# Altium PCB PCB3.PcbDoc
Units mil, origin at the board's own origin, x right, y up, seen from the top; angles counter-clockwise.
Board outline 1295 x 860 mil, 2 copper layers (Top Layer, Bottom Layer); 12 components, 9 nets, 58 pads, 7 vias.
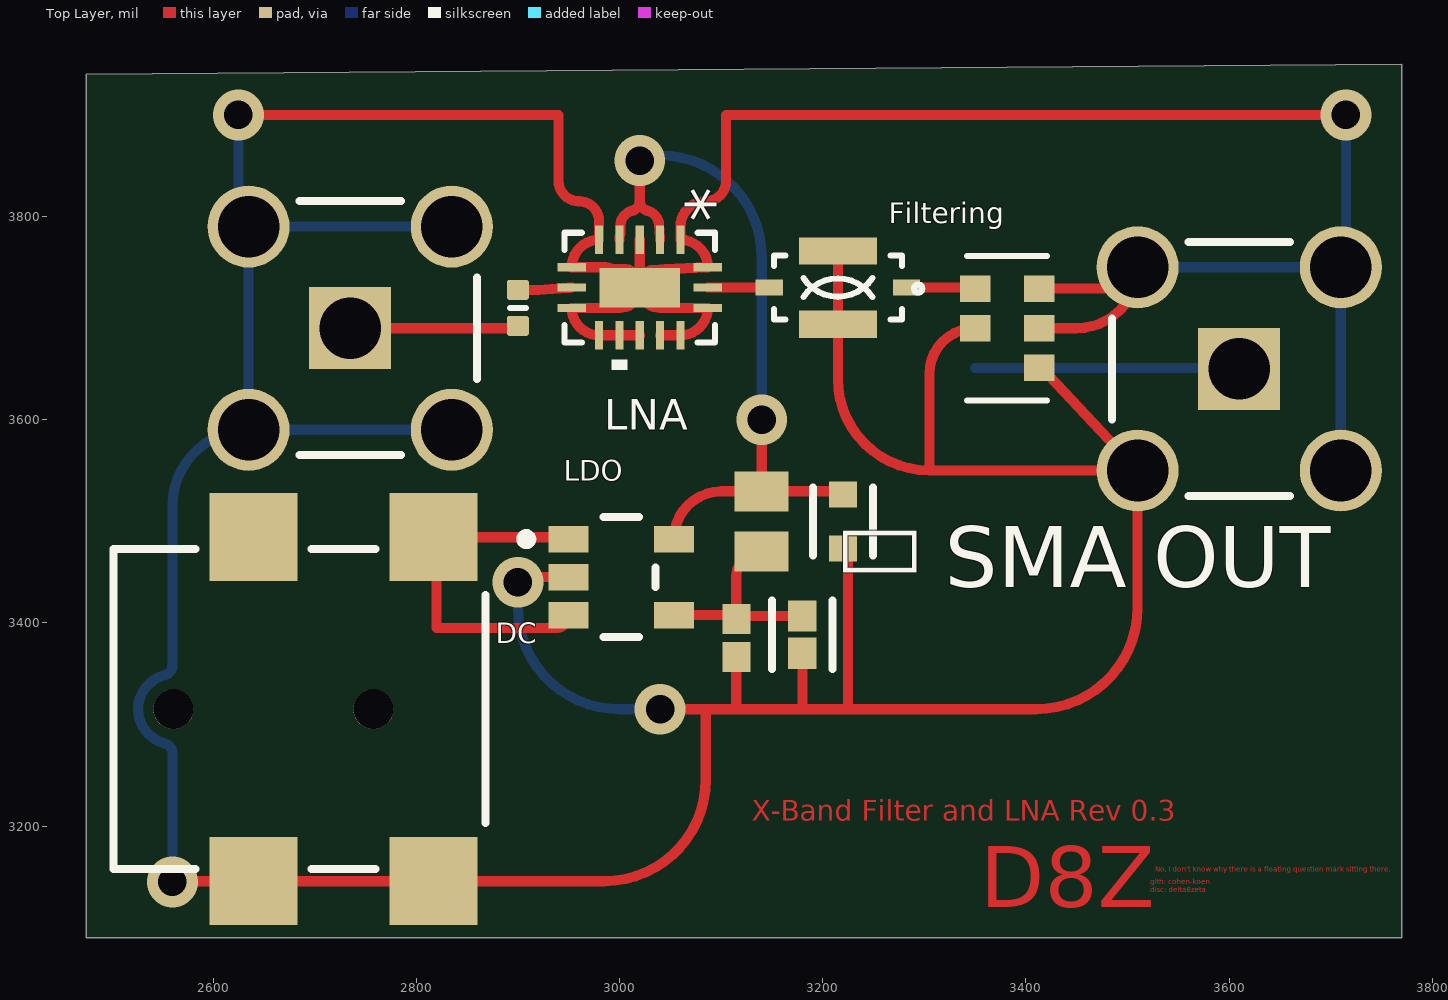
[diagram p0: Top Layer view]
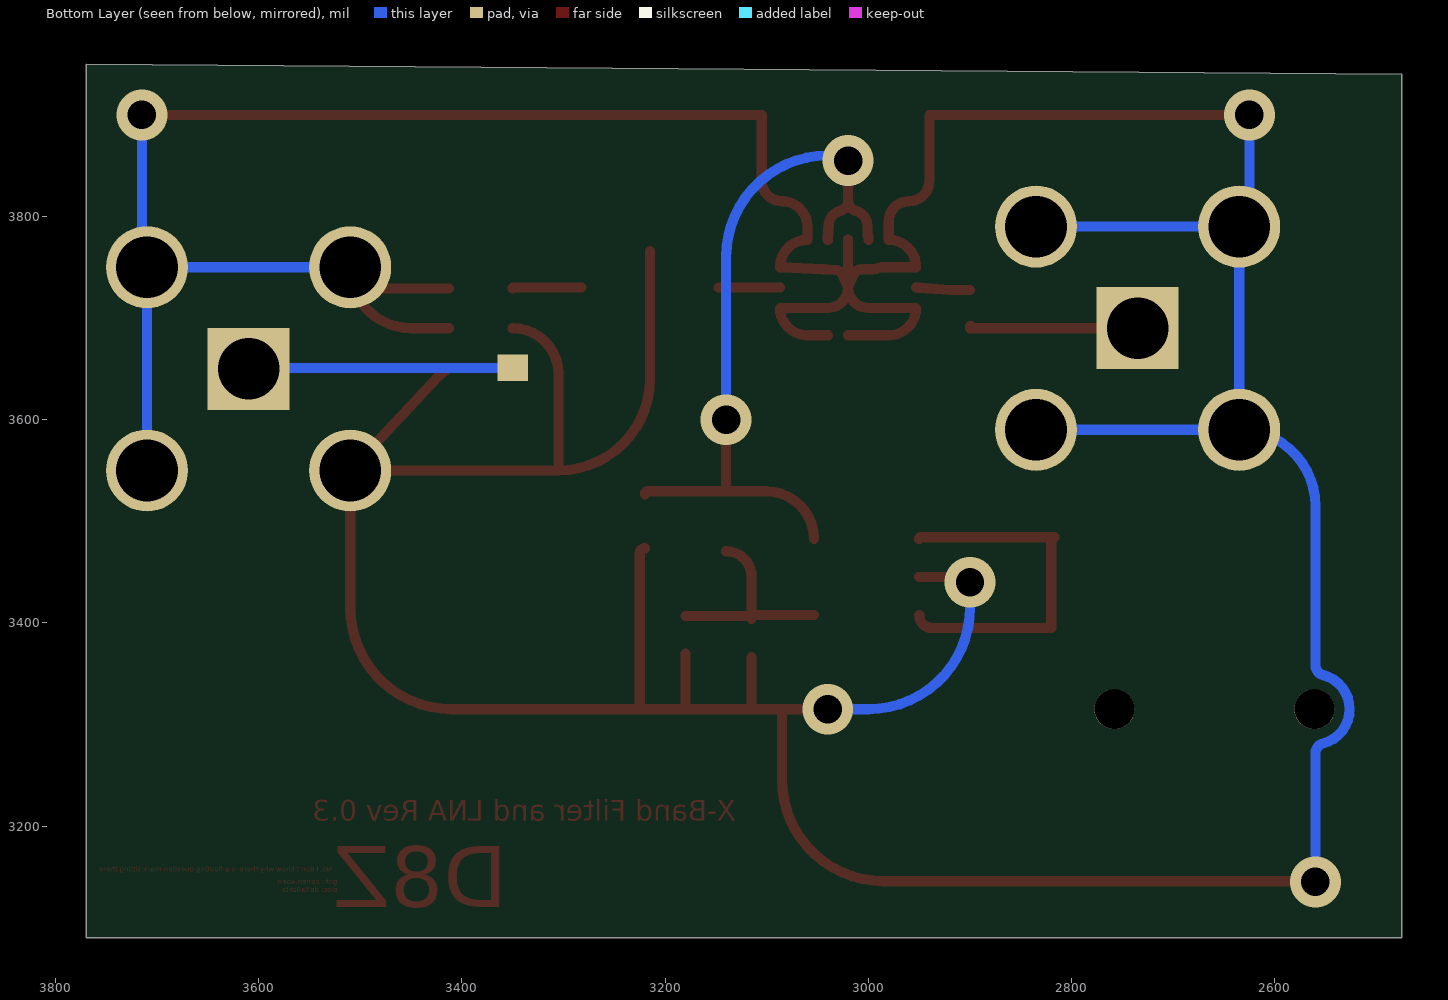
[diagram p1: Bottom Layer view, seen from below]
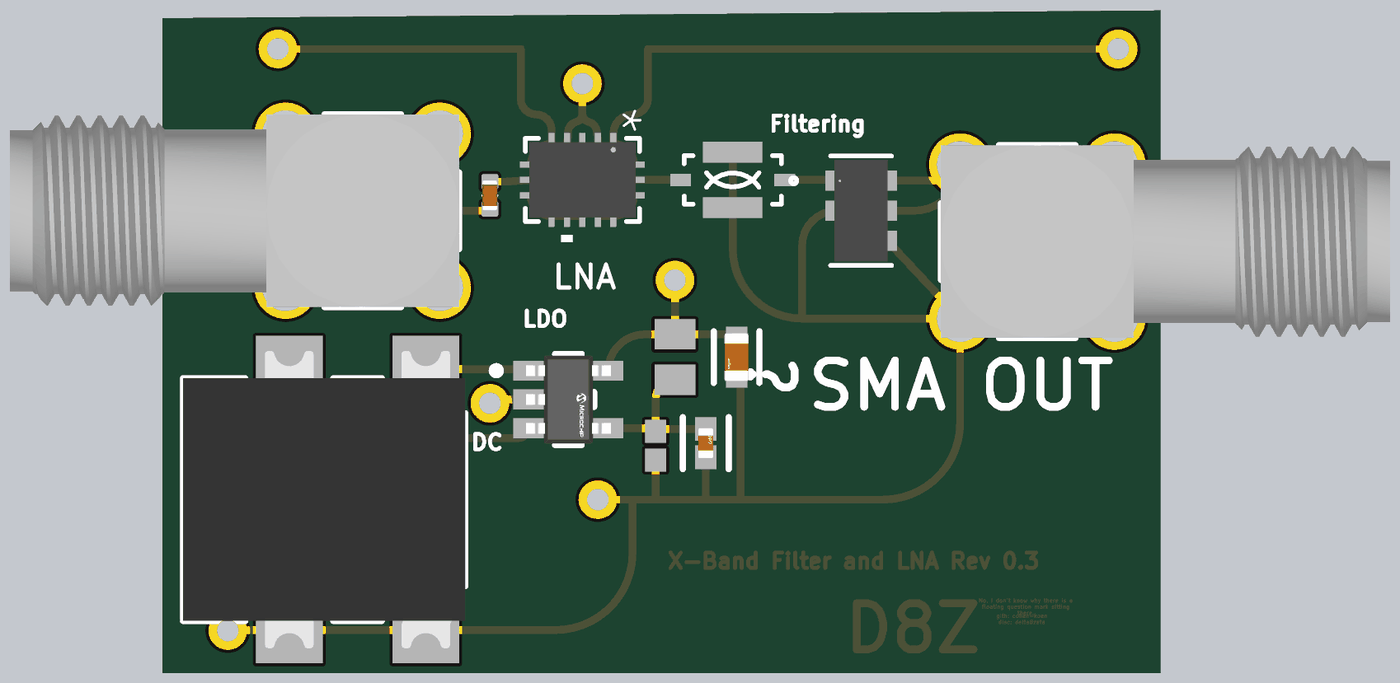
[diagram p2: 3D render of the assembled board from above, using the file's embedded part models]

## Layer stack, top to bottom
Top Solder: solder mask 0.4, Solder Resist, Dk 3.5
Top Layer: signal copper 1.4
Dielectric 1: dielectric 12.6, FR-4, Dk 4.8
Bottom Layer: signal copper 1.4
Bottom Solder: solder mask 0.4, Solder Resist, Dk 3.5

## Board outline
2475,3940 3770,3950 3770,3090 2475,3090

## Design rules (kind name [scope] priority, off if disabled: settings)
Clearance [All] p1: gap=10 ignorepadtopadclearanceinfootprint=FALSE except(0: Arc-Hole Track-Hole SMDPad-Hole THPad-Hole Via-Hole Fill-Hole Poly-Hole Region-Hole Text-Hole)
PolygonConnect [All] p1: connectstyle=Relief reliefconductorwidth=10 reliefentries=4 polygonreliefangle="90 Angle" airgapwidth=10
RoutingVias [All] p1: holewidth=28 width=50 viastyle="Through Hole" minholewidth=28 minwidth=50 maxholewidth=28 maxwidth=50
SolderMaskExpansion [All] p1: expansion=4 istentingtop=FALSE
Width [All] p1: maxlimit=10 minlimit=10 preferedwidth=10
30 further rules are at their usual default settings.

## Classes and differential pairs
component class Sheet1:  DC Filtering LDO LNA "SMA OUT"

## Components (designator, comment, footprint, x,y, rotation, side; value= is the part's Value field where it differs from the comment)
 "" RESC2013X60X40LL20T25 3140,3500 r270 top (schematic designator R3)
C2 "2.2 uF" FP-GRM188-0_1-e0_2_0_5-MFG 3220,3500 r270 top value=2.2uF
C3 "470 pF" FP-0402-L_1_0_1-W_0_5_0_1-IPC_A 3180,3388.33 r90 top value=470pF
DC "694102107102" 694102107102 2685,3315 r270 top (schematic designator J?)
Filtering "HFCN-7150+" FV1206-1_MNC 3381.5,3690 r0 top (schematic designator U1)
LDO "MIC5205YM5-TR" FP-SOT23-5LD-PL-1-MFG 3001.77,3445 r0 top (schematic designator U4)
LNA "Capacitor 10nF +/-20% 50V 0402" CAPC0402(1005)60_L 2900,3710 r90 top value=10nF (schematic designator C1)
R2 "" RESC1005X40X25ML10T10 3115,3385 r270 top
"SMA OUT" "731000114" MOLX-731000114_V 3610,3650 r180 top
U2 "LFCN-8400+" FV1206-4_MNC 3215,3730 r0 top
U3 "PMA-183PLN+" JV2579_MNC 3020,3730 r270 top
? "731000114" MOLX-731000114_V 2735,3690 r0 top

## Footprints (in the part's own frame and the unit in brackets; to place one, negate y for a bottom-side part, rotate by r counter-clockwise, add the part's x,y. Pads: shape width x height; smd on the part's side, far side on the other; paste and mask are expansions set on the pad)
694102107102 [mm] "DC Power Jack Right Angled Low Profile SMT ?3.9 with 4 soldering pads & pegs"
  rect 2.2x2.2 smd: 1(-4.3,3.35) 1(-4.3,-1.15) 2(4.3,-1.15) 3(4.3,3.35)
  round 1 hole 1 unplated: MH1(0,1.85) MH2(0,-3.15)
  silkscreen extent -4,-4.65 4,4.65, body extent -4.9,-4.65 4.9,4.65, height 5.32
CAPC0402(1005)60_L [mm] "Chip Capacitor, Body 1.0x0.5mm, Height 0.6mm, IPC High Density"
  rrect25% 0.5x0.55 smd: 1(-0.45,0) 2(0.45,0)
  silkscreen extent 0,-0.2 0,0.2, body extent -0.5,-0.25 0.5,0.25, height 0.6
FP-0402-L_1_0_1-W_0_5_0_1-IPC_A [mil]
  rect 30.75x28.04 smd paste+0 mask+0: 1(-18.33,0) 2(18.33,0)
  silkscreen extent -34,-30 34,30, body extent -42,-22 42,22, height 10
FP-GRM188-0_1-e0_2_0_5-MFG [mm]
  rect 0.65x0.7 smd paste+0 mask+0: 1(-0.675,0) 2(0.675,0)
  silkscreen extent -0.85,-0.75 0.85,0.75, body extent -1.1,-0.55 1.1,0.55, height 0.25
FP-SOT23-5LD-PL-1-MFG [mm]
  rect 1x0.66 smd paste+0 mask+0: 1(-1.315,0.95) 2(-1.315,0) 3(-1.315,-0.95) 4(1.315,-0.95) 5(1.315,0.95)
  silkscreen extent -2.5,-1.5 0.85,1.5, body extent -1.91,-1.6 1.91,1.6, height 0.25
FV1206-1_MNC [mil]
  rect 30x26 smd paste+0 mask+0: 1(-31.5,39) 2(-31.5,0) 4(31.5,-39) 5(31.5,0) 6(31.5,39)
  rect 30x26 smd far side paste+0 mask+0: 3(-31.5,-39)
  silkscreen extent -91,-71 40,71, body extent -34,-66 34,66, height 42
FV1206-4_MNC [mil]
  rect 27x16 smd paste+0 mask+0: 1(-67.5,0) 3(67.5,0)
  rect 77x27 smd paste+0 mask+0: 2(0,-36) 4(0,36)
  silkscreen extent -63,-32 63,32
JV2579_MNC [mil]
  rect 28x8 smd paste+0 mask+0: 1(-47,40) 2(-47,20) 3(-47,0) 4(-47,-20) 5(-47,-40) 9(47,-40) 10(47,-20) 11(47,0) 12(47,20) 13(47,40)
  rect 8x28 smd paste+0 mask+0: 6(-20,-67) 7(0,-67) 8(20,-67) 14(20,67) 15(0,67) 16(-20,67)
  rect 39x79 smd paste+0 mask+0: 17(0,0)
  silkscreen extent -54,-74 81,74, body extent -49,-69 49,69, height 33
MOLX-731000114_V [mm] "Connector, 5-Leads, Body 14.8x6.35mm, Pitch 2.54mm"
  rect 2.05x2.05 hole 1.54: 1(0,0)
  round 2.05 hole 1.54: 2(-2.54,2.54) 3(-2.54,-2.54) 4(2.54,-2.54) 5(2.54,2.54)
  silkscreen extent -1.26,-3.17 3.17,3.17, body extent -11.62,-3.17 3.18,3.18, height 9.57
RESC1005X40X25ML10T10 [mm] "Chip Resistor, 2-Leads, Body 1.00x0.50mm, IPC Low Density"
  rect 0.75x0.7 smd: 1(-0.475,0) 2(0.475,0)
  body extent -0.55,-0.3 0.55,0.3, height 0.4
RESC2013X60X40LL20T25 [mm] "Chip Resistor, 2-Leads, Body 2.00x1.25mm, IPC High Density"
  rect 1x1.35 smd: 1(-0.75,0) 2(0.75,0)
  body extent -1.1,-0.72 1.1,0.72, height 0.6

## Part data
: library part CMP-2001-00628-1, Manufacturer=Panasonic, Part Number=ERA6AEB331V
C2: library part CMP-2006-02836-2, "Chip Multilayer Ceramic Capacitors for General Purpose, 0603, 2.2uF, X7R, 15%, 10%, 10V", Capacitance=2.2uF, Case Code (Imperial)=0603, Case Code (Metric)=1608, Dielectric=X7R, Max Operating Temperature=125°C, Min Operating Temperature=-55°C, Package Quantity=1, Tolerance=10%, Voltage=10V, Case/Package=0603, Depth=0.8mm, Height=0.8mm, Lead Free="Lead Free", Length=1.6mm, Material=Ceramic, Mount="Surface Mount", Number of Pins=2, Packaging="Cut Tape", REACH SVHC="No SVHC", Termination=SMD/SMT, Thickness=0.035inch, Voltage Rating=10V, Voltage Rating (DC)=10V, Weight=7.1E-05oz, Width=0.031inch
C3: library part CMP-1034-01502-3, "General Purpose Ceramic Capacitor, 0402, 470pF, 10%, X7R, 15%, 50V", Capacitance=470pF, Case Code (Imperial)=0402, Case Code (Metric)=1005, Dielectric=X7R, Max Operating Temperature=125°C, Min Operating Temperature=-55°C, Package Quantity=10000, Tolerance=10%, Voltage=50V, Case/Package=0402, Construction=Flat, Contact Plating=Tin, Depth=0.5mm, Height=0.5mm, Lead Free="Lead Free", Length=1mm, Mount="Surface Mount", Number of Pins=2, Packaging="Tape and Reel", Radiation Hardening=No, REACH SVHC="No SVHC", RoHS Compliant=Yes, Series=-, Termination=SMD/SMT, Thickness=0.022inch, Voltage Rating=50V, Voltage Rating (DC)=50V, Width=0.5mm
DC: library part CMP-1502-00174-2, Color=Black, Current Rating=5A, Flammability Rating="UL94 V-0", Insulation Resistance=100MΩ, Max Operating Temperature=85°C, Min Operating Temperature=-40°C, Operating Supply Voltage=18V, Connector Type=Power, Contact Gender=Female, Contact Plating=Tin, Gender=Male, Housing Material=Polyamide, Mount="Surface Mount", NexarPartId=52645180, Packaging="Tape and Reel", REACH SVHC=Unknown, RoHS=Compliant, Shielding=Unshielded, Termination=SMD/SMT, Voltage Rating=18V, Voltage Rating (DC)=18V
Filtering U2 U3: "No Description Available", Mfr_Name="Mini Circuits", Copyright="Copyright (C) 2024 Ultra Librarian. All rights reserved.", RefDes=RefDes, Type=DEV
  Filtering: Manufacturer_Part_Number=HFCN-7150+
  U2: Manufacturer_Part_Number=LFCN-8400+
  U3: Manufacturer_Part_Number=PMA-183PLN+
LDO: library part CMP-06324-000022-1, "IC REG LIN POS ADJ 150MA SOT23-5", Dropout Voltage=165mV, Manufacturer=Microchip, Max Junction Temp=+125°C, Max Supply Voltage=16V, Min Supply Voltage=2.5V, Nominal Supply Current=80-1300uA, Output Current=150mA, Package=SOT23-5LD-PL-1, Temperature="-40°C to +125°C", Temperature Range Low=-40°C, Accuracy Percentage=1%, Automotive=No, Category=IC, ComponentLink2Description=Datasheet, ComponentLink2URL=http://ww1.microchip.com/downloads/en/DeviceDoc/20005785A.pdf, Device Class L1="Integrated Circuits (ICs)", Device Class L2="Power Management ICs", Device Class L3="Voltage Regulators - Linear", Digikey Description="IC REG LIN POS ADJ 150MA SOT23-5", Height=1.45mm, Lead Free=Yes, Manufacturer Part Number=MIC5205YM5-TR, Mouser Description="LDO Voltage Regulators 150mA 1% Low Noise LDO (Lead Free)", Number Of Outputs=1, Octopart=https://octopart.com/mic5205ym5-tr-microchip-66802135, Output Type=AdjustableProgrammable, RoHS=TRUE, Standoff Height=0mm, Temperature Range High=+125°C
LNA: library part CMP-001-00069-3, "Chip Capacitor, 10nF +/-20%, 50V, 0402, Thickness 0.6 mm", Case/Package=0402, Max Operating Temperature=85°C, Min Operating Temperature=-55°C, Tolerance=5%, Voltage Rating=50V, Mounting Technology=SMT, Pins=2
R2: library part CMP-2002-05819-1, Manufacturer=Panasonic, Part Number=ERA-2AEB621X
"SMA OUT" ?: library part CMP-2000-05487-1, "SMA Right-Angle PCB Jack Receptacle, Brass Body, Gold Plated, 50 Ohm, 5-Pin THD, RoHS, Tray", Manufacturer=Molex, Package Description="5-Pin Through Hole Device, Body 14.8 x 6.35 mm, Pitch 2.54 mm", Datasheet URL=http://www.molex.com/webdocs/datasheets/pdf/en-us/0731000114_RF_COAX_CONNECTORS.pdf, Datasheet Version=09/2016, Manufacturer URL=http://www.molex.com/, Mounting Technology=ThroughHole, Package Reference=731000114, Package URL=http://www.molex.com/pdm_docs/sd/731000114_sd.pdf

## Via types
v1: diameter 50, hole 28, Top Layer to Bottom Layer, 7 vias

## Nets (pads, with @x,y where several pads share a name; then routed paths per layer and width w, separated by ;. In a path a pad name is that pad's centre, name@x,y a point inside that pad or via, vN(x,y) a via of type N, cw(c..) or ccw(c..) an arc to the next point about the centre after c; other vN are vias at no path point)
GND: "SMA OUT.2" "SMA OUT.3" "SMA OUT.4" "SMA OUT.5" ?.2 ?.3 ?.4 ?.5 C2.2 C3.1 DC.2 DC.3 Filtering.2 Filtering.4 Filtering.5 Filtering.6 LDO.2 R2.2 U2.2 U2.4 U3.1 U3.3 U3.5 U3.6 U3.8 U3.9 U3.10 U3.11 U3.12 U3.13 U3.14 U3.16 U3.17 | length 6468.1
  Top Layer w10: v1(2560,3145) cw(c2560.71,3145) 2560.71,3145.71 DC.2 DC.3 2985,3145.71 ccw(c2985,3245.71) 3085,3245.71 3085,3315 ; v1(2625,3900) 2940,3900 2940,3835 ccw(c2960,3835) 2960,3815 cw(c2960,3795) 2980,3795 U3.5 ccw(c2980,3750) U3.6 2986.25,3750 cw(c2986.2,3740) 2990.09,3749.21 ccw(c2996,3763) 2996,3748 3006,3748 cw(c3006,3738) 3012,3746 cw(c3000,3730) 3013.77,3744.5 U3.17 ; v1@2900,3445 LDO.2 ; U3.11 U3.10 U3.9 cw(c2980,3710) U3.8 3000,3710 ccw(c3000,3730) U3.17 ; U3.3 U3.17 ; U3.17@3026.22,3744.5 U3.17 ; U3.17@3026.23,3744.5 cw(c3040,3730) 3026.77,3745 cw(c3033.36,3737.47) 3032.86,3747.46 3044.7,3748.02 3086.05,3749.98 cw(c3087,3730) U3.16 ccw(c3060,3750) U3.1 3060,3790 cw(c3085,3790) 3085,3815 ccw(c3085,3835) 3105,3835 3105,3900 v1(3715,3900) ; v1(3040,3315) 3085,3315 ; U3.12 U3.13 ccw(c3060,3710) U3.14 3040,3710 cw(c3040,3730) U3.17 ; R2.2 3115,3315 ; C3.1 3180,3315 ; U2.4 U2.2 3215,3640 ccw(c3305,3640) 3305,3550 ; C2.2 cw(c3220,3468.43) 3225,3468.43 3225,3315 ; Filtering.2 ccw(c3350,3645) 3305,3645 3305,3550 ; Filtering.4 3423,3643 3510,3550 ; Filtering.5 3450,3690 ccw(c3450,3750) 3510,3750 cw(c3489,3750) 3489,3729 Filtering.6 ; 3085,3315 3115,3315 ; 3115,3315 3180,3315 ; 3180,3315 3225,3315 ; 3225,3315 3410,3315 ccw(c3410,3415) 3510,3415 3510,3550 ; 3305,3550 3510,3550
  Bottom Layer w10: v1(2560,3145) 2560,3271.69 ccw(c2550,3271.69) 2552.44,3281.38 cw(c2560.99,3315) 2552.48,3348.63 ccw(c2550,3358.31) 2560,3358.31 2560,3515 cw(c2635,3515) ?.3 ; v1(2625,3900) 2625,3800 ccw(c2635,3800) ?.2 ; ?.4 ?.3 ; ?.5 ?.2 ; v1(2900,3440) 2900,3415 ccw(c3000,3415) 3000,3315 v1(3040,3315) ; 3510,3750 3710,3750 ; 3710,3550 3710,3750 ; v1(3715,3900) 3715,3755 cw(c3710,3755) 3710,3750 ; ?.3 ?.2
Net_1: ?.1 LNA.1 | length 168.3
  Top Layer w10: ?.1 2900,3690 LNA.1 LNA.1@2899.02,3692.28
NetC1_2: LNA.2 U3.7 | length 53.1
  Top Layer w10: LNA.2 2919.51,3727.72 ccw(c2919.51,3737.72) 2920.2,3727.74 2949.94,3729.79 ccw(c2949.21,3739.76) 2950.35,3729.83 2950.72,3729.87 cw(c2953,3710) U3.7
NetC3_2: .2 C3.2 LDO.4 R2.1 | length 211.4
  Top Layer w10: LDO.4 3111.1,3407.6 cw(c3111.1,3403.7) R2.1 ; .2 ccw(c3140,3445.47) 3115,3445.47 R2.1 ; C3.2 3117.96,3406.66 ccw(c3117.96,3403.7) R2.1
NetJ?_1: DC.1 LDO.1 LDO.3 | length 362.4
  Top Layer w10: LDO.3 cw(c2937.4,3407.6) 2937.4,3395 2820,3395 2820,3481.18 ccw(c2816.89,3481.18) 2816.89,3484.29 2948.11,3484.29 cw(c2948.11,3482.4) LDO.1
"NetSMA OUT_1": "SMA OUT.1" Filtering.3 | length 261
  Bottom Layer w10: Filtering.3 3610,3651 3610,3650
NetU1_1: Filtering.1 U2.3 | length 68.1
  Top Layer w10: U2.3 3349,3730 cw(c3349,3729) Filtering.1
NetU2_1: U2.1 U3.15 | length 60.5
  Top Layer w10: U3.15 U2.1
VCC: .1 C2.1 LDO.5 U3.2 U3.4 | length 741.8
  Top Layer w10: U3.4 cw(c3020,3777) 3000.67,3782.13 ccw(c2991,3784.68) 3001,3784.68 3001,3791 cw(c3016,3791) 3012.44,3805.57 ccw(c3010,3815.27) 3020,3815.22 ; v1(3020,3855) 3020,3815.22 ; U3.2 ccw(c3020,3777) 3039.94,3778.53 3038.96,3792.03 ccw(c3024,3791) 3027.56,3805.57 cw(c3030,3815.27) 3020,3815.22 ; LDO.5 cw(c3100.67,3482.4) 3100.67,3529.53 .1 ; v1(3140,3600) .1 ; C2.1 ccw(c3217.05,3526.57) 3217.05,3529.53 .1
  Bottom Layer w10: v1(3020,3855) 3020,3860 3040,3860 cw(c3040,3760) 3140,3760 v1(3140,3600)
pads on no net: DC.MH1 DC.MH2

## Other copper
Top Layer:
  text "X-Band Filter and LNA Rev 0.3" at 3130,3205 h20
  text "No, I don't know why there is a floating question mark sitting there." at 3527.5,3155 h5
  text "gith: cohen-koen / disc: delta8zeta" at 3522.5,3135 h5
  text "D8Z" at 3355,3120 h60

## Text inside footprints (layer, text, board x,y; h text height)
U3: Top Overlay "*" at 3045,3828.5 h50 r270; Top Assembly "*" at 3045,3775.5 h50 r270